# Altium PCB SDP_loadcell.PcbDoc
Units mil, origin at the board's own origin, x right, y up, seen from the top; angles counter-clockwise.
Board outline 2875 x 2400 mil, 2 copper layers (Top Layer, Bottom Layer); 25 components, 31 nets, 158 pads, 51 vias.
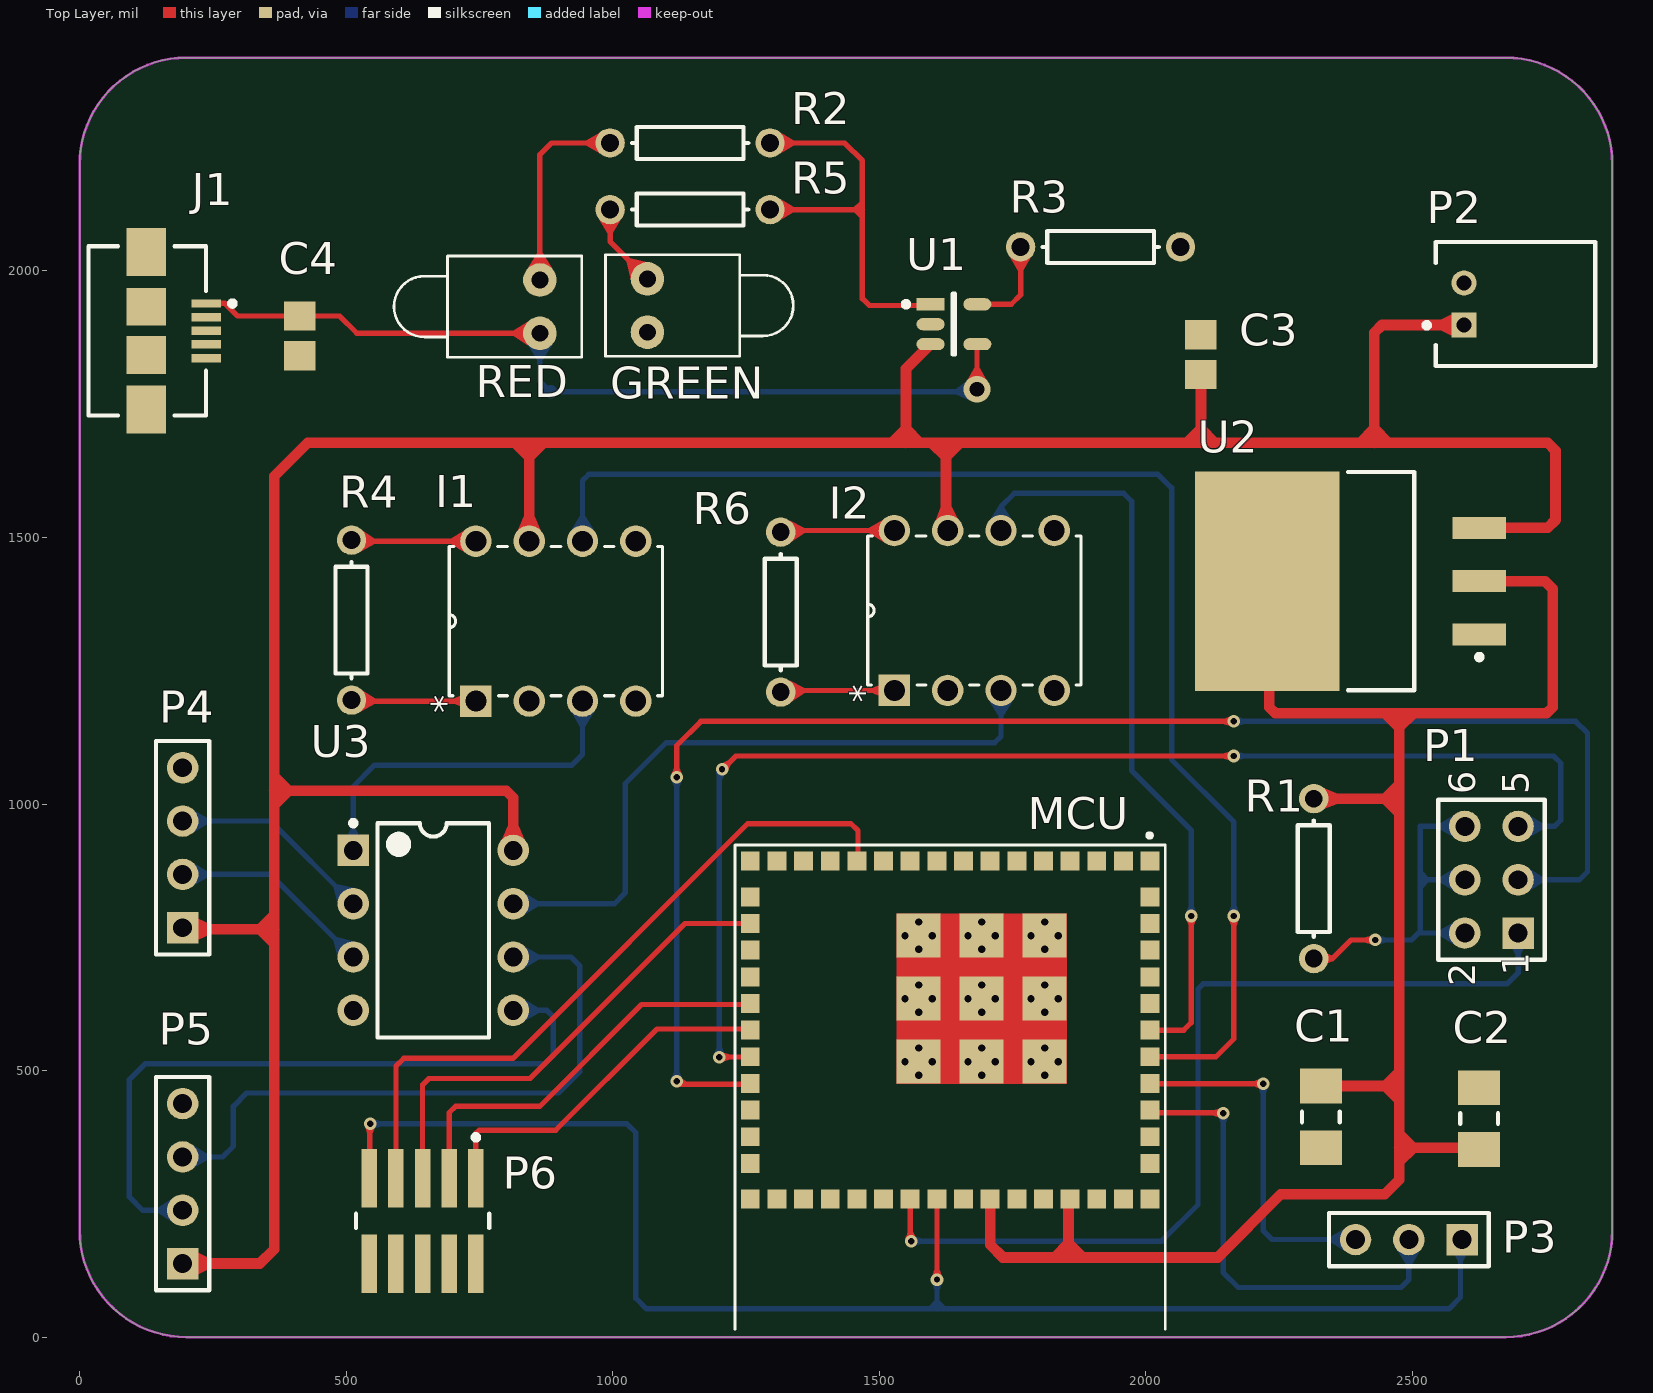
[diagram p0: Top Layer view]
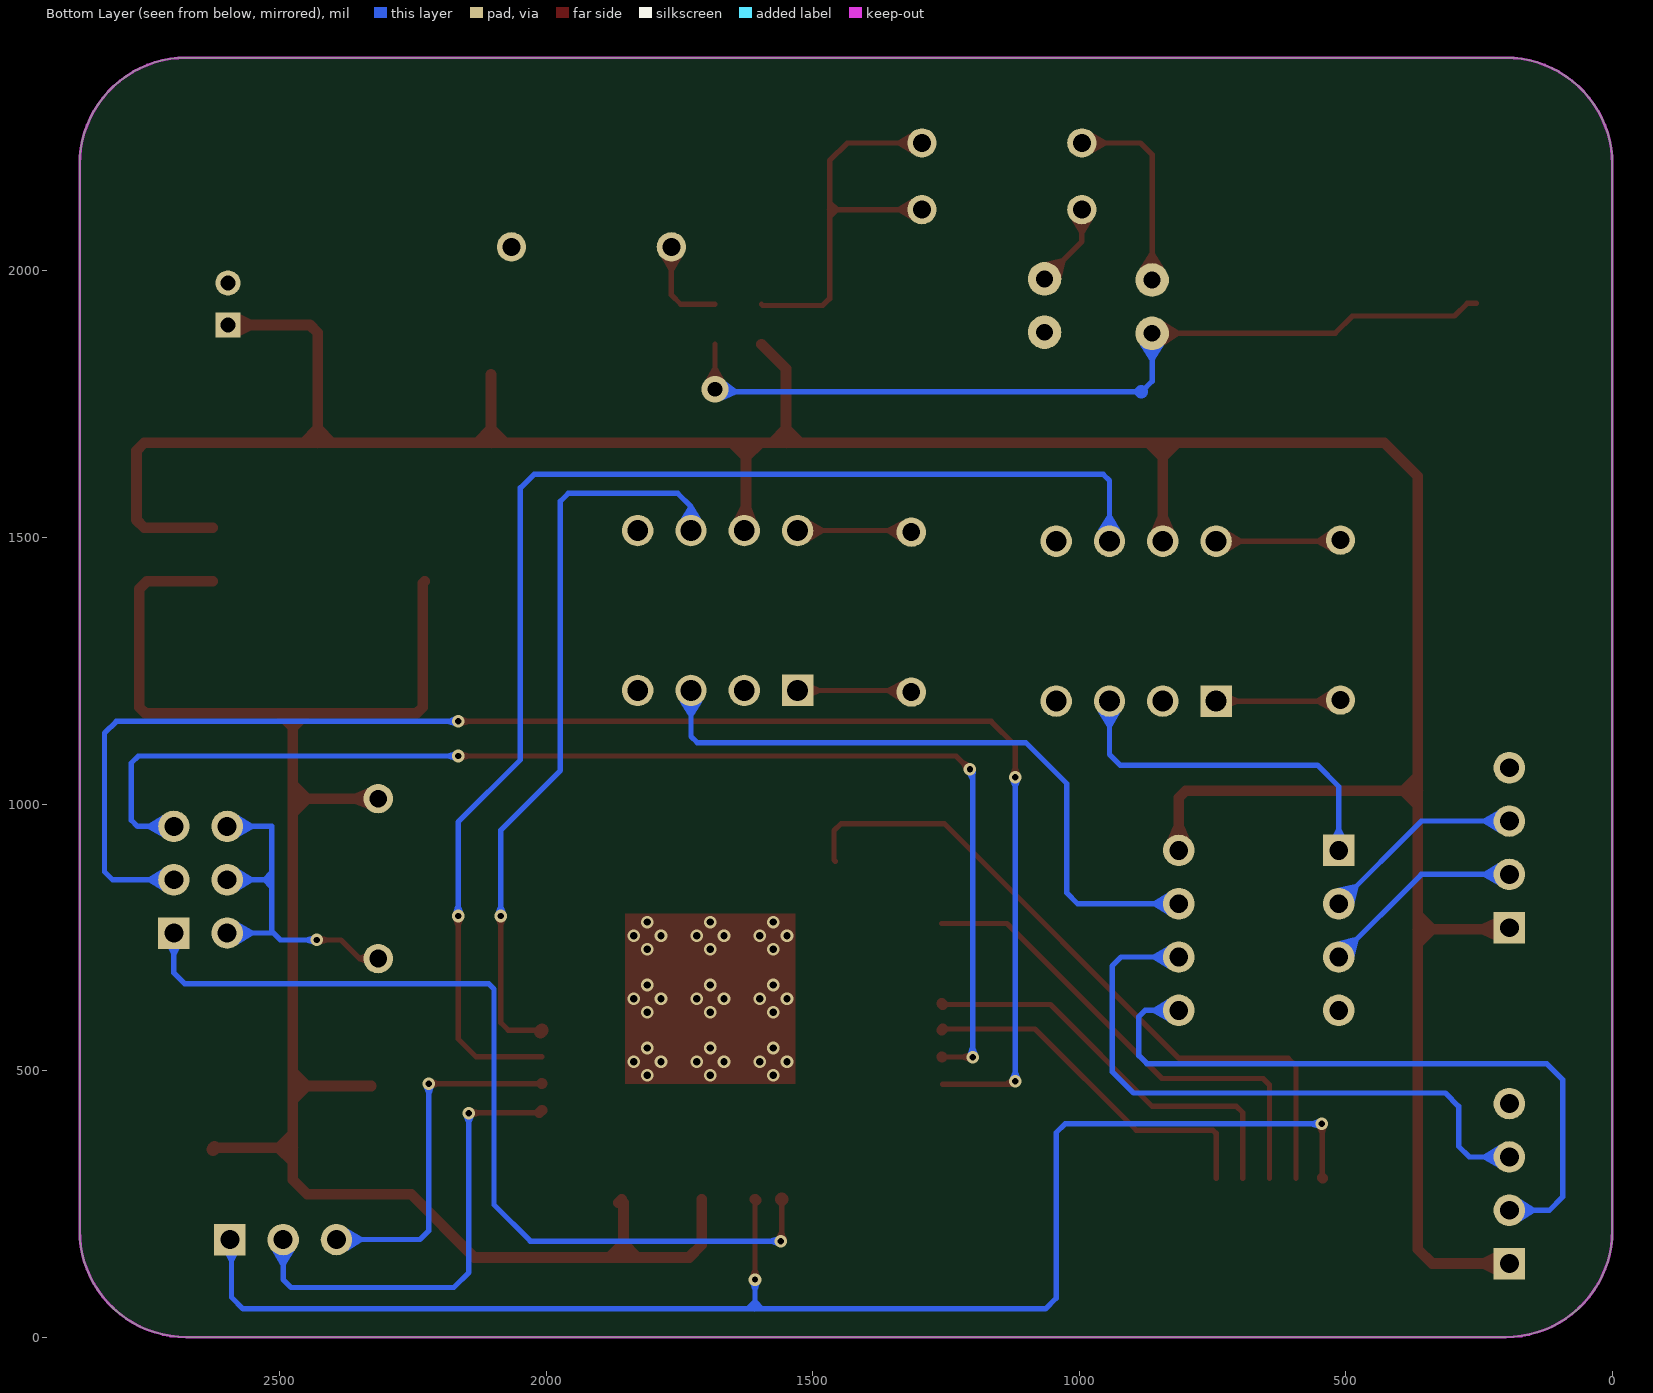
[diagram p1: Bottom Layer view, seen from below]

## Layer stack, top to bottom
Top Solder: solder mask 0.4, Solder Resist, Dk 3.5
Top Layer: signal copper 1.4
Dielectric 1: dielectric 12.6, FR-4, Dk 4.8
Bottom Layer: signal copper 1.4
Bottom Solder: solder mask 0.4, Solder Resist, Dk 3.5

## Board outline
0,200 0,2200 cw(c200,2200) 200,2400 2675,2400 cw(c2675,2200) 2875,2200 2875,200 cw(c2675,200) 2675,0 200,0 cw(c200,200)

## Design rules (kind name [scope] priority, off if disabled: settings)
BoardOutlineClearance [All] p1: gap=7.87 ignorepadtopadclearanceinfootprint=FALSE
Clearance [All] p1: gap=8 ignorepadtopadclearanceinfootprint=FALSE except(9.84: Arc-Hole Track-Hole SMDPad-Hole THPad-Hole Via-Hole Fill-Hole Poly-Hole Region-Hole Text-Hole)
ComponentClearance [All] p1: gap=5 collisioncheckmode=3 verticalgap=5 showdistances=TRUE
DiffPairsRouting [All] p1: maxlimit=15 minlimit=8 mostfreqgap=8 toplayer_minwidth=8 toplayer_maxwidth=1000 toplayer_prefwidth=8 bottomlayer_minwidth=8 bottomlayer_maxwidth=1000 bottomlayer_prefwidth=8 maxuncoupledlength=500
Height [All] p1: minheight=0 maxheight=71497.94 prefheight=500
HoleSize [All] p1: absolutevalues=TRUE maxlimit=248.03 minlimit=11.81 maxpercent=80.000 minpercent=20.000
HoleToHoleClearance [All] p1: gap=9.84 allowstackedmicrovias=FALSE
MinimumAnnularRing [All] p1: minimumring=3
MinimumSolderMaskSliver [All] p1: minsoldermaskwidth=0
PlaneClearance [All] p1: clearance=8
PlaneConnect PlaneConnectPowerPads [InPadClass('PowerPads')] p1: planeconnectstyle=Direct reliefexpansion=20 reliefentries=4 reliefconductorwidth=10 reliefairgap=10
PlaneConnect [All] p2: pad.planeconnectstyle=Relief pad.reliefexpansion=11.81 pad.reliefentries=4 pad.reliefconductorwidth=8 pad.reliefairgap=8 via.planeconnectstyle=Direct via.reliefexpansion=11.81 via.reliefentries=4 via.reliefconductorwidth=5 via.reliefairgap=5
PolygonConnect PowerGround [InNet('GND')OR InNet('+3.3')OR InNet('+3.7')] p1: thpad.connectstyle=Relief thpad.reliefconductorwidth=15 thpad.reliefentries=4 thpad.polygonreliefangle="90 Angle" thpad.airgapwidth=10 smdpad.connectstyle=Relief smdpad.reliefconductorwidth=15 smdpad.reliefentries=4 smdpad.polygonreliefangle="90 Angle" smdpad.airgapwidth=10 via.connectstyle=Direct via.reliefconductorwidth=5 via.reliefentries=4 via.polygonreliefangle="90 Angle" via.airgapwidth=5
PolygonConnect PolygonConnectPowerPads [All vs (InPadClass('PowerPads'))] p2: connectstyle=Direct reliefconductorwidth=10 reliefentries=4 polygonreliefangle="90 Angle" airgapwidth=10
PolygonConnect [All] p3: thpad.connectstyle=Relief thpad.reliefconductorwidth=8 thpad.reliefentries=4 thpad.polygonreliefangle="90 Angle" thpad.airgapwidth=8 smdpad.connectstyle=Relief smdpad.reliefconductorwidth=8 smdpad.reliefentries=4 smdpad.polygonreliefangle="90 Angle" smdpad.airgapwidth=8 via.connectstyle=Direct via.reliefconductorwidth=5 via.reliefentries=4 via.polygonreliefangle="90 Angle" via.airgapwidth=5
RoutingVias [All] p1: holewidth=11.81 width=23.62 viastyle="Through Hole" minholewidth=11.81 minwidth=23.62 maxholewidth=23.62 maxwidth=259.84
SilkToSilkClearance [All] p1: silktosilkclearance=0
SilkToSolderMaskClearance [IsPad] p1: minsilkscreentomaskgap=5 clearancetoexposedcopper=TRUE
SolderMaskExpansion "Tent vias" [IsVia] p1: expansion=2.95 istentingtop=TRUE
SolderMaskExpansion [All] p2: expansion=2.95 istentingtop=FALSE
Width "3.7 Width" [InNet('+3.7')] p1: maxlimit=1000 minlimit=8 preferedwidth=20 minimp=50.000000 maximp=50.000000 favimp=50.000000
Width "Power Width" [InNet('+3.3')] p2: maxlimit=1000 minlimit=8 preferedwidth=20 minimp=50.000000 maximp=50.000000 favimp=50.000000
Width [All] p3: maxlimit=1000 minlimit=8 preferedwidth=10 minimp=50.000000 maximp=50.000000 favimp=50.000000
20 further rules are at their usual default settings.

## Components (designator, comment, footprint, x,y, rotation, side; value= is the part's Value field where it differs from the comment)
C1 "GRM31CR60J107ME39L" CAPC3216X190X55ML30T25 2328.26,412.98 r90 top
C2 "GRM31CR60J107ME39L" CAPC3216X190X55ML30T25 2625,410 r270 top
C3 "GRM21BR61A106KE19L" MURA-0805_H_1.35_M 2103.26,1842.98 r90 top
C4 "GRM21BR61A106KE19L" MURA-0805_H_1.35_M 413.26,1877.98 r90 top
GREEN "LED1" LED-1 1065,1935 r0 top
I1 "AD623ANZ" DIP254P762X533-8 1043.26,1492.98 r90 top
I2 "AD623ANZ" DIP254P762X533-8 1828.26,1512.98 r90 top
J1 "10104110-0001LF" FCI-10104110-0001LF_V 181.1,1887.64 r270 top
MCU "CC3220MODASF12MONR" XCVR_CC3220MODASF12MONR 1632.9,575.81 r270 top
P1 "Header 3X2" HDR2X3 2698.26,757.98 r90 top
P2 "S2B-PH-K-S(LF)(SN)" JST-S2B-PH-K-S_V 2693.26,1937.98 r90 top
P3 "Header 3" HDR1X3 2593.26,182.98 r180 top
P4 "Header 4" HDR1X4 193.26,767.98 r90 top
P5 "Header 4" HDR1X4 193.26,137.98 r90 top
P6 "FTSH-105-01-F-DV-K" SMTC-FTSH-105-01-L-DV-K_V 643.26,217.98 r180 top
R1 "Res1" AXIAL-0.3 2315,860 r90 top value="270 ohm"
R2 "Res1" AXIAL-0.3 1145,2240 r0 top value="470 ohm"
R3 "Res1" AXIAL-0.3 1915,2045 r0 top value="1k ohm"
R4 "Res1" AXIAL-0.3 510,1345 r90 top value="27k ohm"
R5 "Res1" AXIAL-0.3 1145,2115 r0 top value="470 ohm"
R6 "Res1" AXIAL-0.3 1315,1360 r90 top value="27k ohm"
RED "LED1" LED-1 863.26,1932.98 r180 top
U1 "MCP73831T-2ACI/OT" FP-C04-091-OT-IPC_B 1640,1900 r0 top
U2 "LM1086CSX-ADJ/NOPB" KTT0003B_L 2383.26,1417.98 r180 top
U3 "AD823ANZ" ADI-N-8 663.26,762.98 r0 top

## Footprints (in the part's own frame and the unit in brackets; to place one, negate y for a bottom-side part, rotate by r counter-clockwise, add the part's x,y. Pads: shape width x height; smd on the part's side, far side on the other; paste and mask are expansions set on the pad)
ADI-N-8 [mm] "DIP, 8-Leads, Body 9.59x6.6mm, Pitch 2.54mm"
  rect 1.5x1.5 hole 0.9: 1(-3.81,3.81)
  round 1.5 hole 0.9: 2(-3.81,1.27) 3(-3.81,-1.27) 4(-3.81,-3.81) 5(3.81,-3.81) 6(3.81,-1.27) 7(3.81,1.27) 8(3.81,3.81)
  silkscreen extent -3.93,-5.1 2.65,5.23, body extent -3.95,-5.07 3.95,5.07, height 5.33
AXIAL-0.3 [mm] "Axial Device, Thru-Hole; 2 Leads; 0.3 in Pin Spacing"
  round 1.4 hole 0.85: 1(-3.81,0) 2(3.81,0)
  silkscreen extent -2.77,-0.76 2.77,0.76
CAPC3216X190X55ML30T25 [mm] "Chip Capacitor, 2-Leads, Body 3.5x1.9mm, IPC Low Density"
  rect 1.65x2 smd: 1(-1.475,0) 2(1.475,0)
  silkscreen extent -0.25,-0.9 0.25,0.9, body extent -1.75,-0.95 1.75,0.95, height 1.9
DIP254P762X533-8 [mil]
  rect 59x59 hole 39: 1(-300,300)
  round 59 hole 39: 2(-300,200) 3(-300,100) 4(-300,0) 5(0,0) 6(0,100) 7(0,200) 8(0,300)
  silkscreen extent -290,-50 -10,350
FCI-10104110-0001LF_V [mm] "SMD, 5-Leads, Body 8.06x5.6mm, Pitch 0.65mm"
  rect 0.4x1.4 smd: 1(-1.3,1.425) 2(-0.65,1.425) 3(0,1.425) 4(0.65,1.425) 5(1.3,1.425)
  rect 1.8x1.9 smd: 6(-1.15,-1.425) 7(1.15,-1.425)
  rect 2.3x1.9 smd: 8(-3.75,-1.425) 9(3.75,-1.425)
  silkscreen extent -4.03,-4.17 4.03,2.8, body extent -4.03,-4.17 4.03,1.43, height 2.95
FP-C04-091-OT-IPC_B [mm]
  rect 1.338x0.578 smd paste+0 mask+0: 1(-1.116,0.95)
  rrect100% 1.338x0.578 smd paste+0 mask+0: 2(-1.116,0) 3(-1.116,-0.95) 4(1.116,-0.95) 5(1.116,0.95)
  silkscreen extent -2.41,-1.45 0.05,1.45
HDR1X3 [mm] "Connector; Header; 3 Position"
  rect 1.5x1.5 hole 0.9: 1(0,0)
  round 1.5 hole 0.9: 2(2.54,0) 3(5.08,0)
  silkscreen extent -1.27,-1.27 6.35,1.27
HDR1X4 [mm] "Connector; Header; 4 Position"
  rect 1.5x1.5 hole 0.9: 1(0,0)
  round 1.5 hole 0.9: 2(2.54,0) 3(5.08,0) 4(7.62,0)
  silkscreen extent -1.27,-1.27 8.89,1.27
HDR2X3 [mm] "Connector; Header; 3x2 Position"
  rect 1.5x1.5 hole 0.9: 1(0,0)
  round 1.5 hole 0.9: 2(0,2.54) 3(2.54,0) 4(2.54,2.54) 5(5.08,0) 6(5.08,2.54)
  silkscreen extent -1.27,-1.27 6.35,3.81
JST-S2B-PH-K-S_V [mm] "THD, 2-Leads, Body 7.6x5.9mm, Pitch 2mm"
  rect 1.2x1.2 hole 0.7: 1(-1,2.45)
  round 1.2 hole 0.7: 2(1,2.45)
  silkscreen extent -2.95,-3.8 2.95,4.35, body extent -2.95,-3.8 2.95,3.8, height 4.8
KTT0003B_L [mm] "D2-PAK, 3-Leads, Body 10.41x8.89mm, Pitch 2.54mm, IPC High Density"
  rect 2.55x1.05 smd: 1(-6.15,2.54) 2(-6.15,0) 3(-6.15,-2.54)
  rect 6.9x10.45 smd: 4(3.95,0)
  silkscreen extent -6.28,-5.2 0.1,5.2, body extent -6.83,-5.2 7.52,5.2, height 4.64
LED-1 [mm] "LED; 2 Leads"
  round 1.6 hole 0.8: 1(0,1.27) 2(0,-1.27)
  silkscreen extent -2,-2.41 6.95,2.41
MURA-0805_H_1.35_M [mm] "SMD, 2-Leads, Body 2.1x1.35mm, IPC Low Density"
  rect 1.4x1.5 smd: 1(-0.95,0) 2(0.95,0)
  body extent -1.05,-0.67 1.05,0.67, height 1.35
SMTC-FTSH-105-01-L-DV-K_V [mm] "CONN, 10-Leads, Body 6.35x3.43mm, Pitch 1.27mm"
  rect 0.74x2.79 smd: 1(-2.54,-2.035) 2(-2.54,2.035) 3(-1.27,-2.035) 4(-1.27,2.035) 5(0,-2.035) 6(0,2.035) 7(1.27,-2.035) 8(1.27,2.035) 9(2.54,-2.035) 10(2.54,2.035)
  silkscreen extent -3.17,-4.1 3.17,0.34, body extent -3.17,-2.92 3.18,2.92, height 6.12
XCVR_CC3220MODASF12MONR [mm]
  rect 0.9x0.9 smd paste-1 mask+0: 1(-8.05,9.525) 2(-8.05,8.255) 3(-8.05,6.985) 4(-8.05,5.715) 5(-8.05,4.445) 6(-8.05,3.175) 7(-8.05,1.905) 8(-8.05,0.635) 9(-8.05,-0.635) 10(-8.05,-1.905) 11(-8.05,-3.175) 12(-8.05,-4.445) 13(-8.05,-5.715) 14(-8.05,-6.985) 15(-8.05,-8.255) 16(-8.05,-9.525) 17(-6.35,-9.524) 18(-5.08,-9.524) 19(-3.81,-9.524) 20(-2.54,-9.524) 21(-1.27,-9.524) 22(0,-9.524) 23(1.27,-9.524) 24(2.54,-9.524) 25(3.81,-9.524) 26(5.08,-9.524) 27(6.35,-9.524) 28(8.05,-9.525) 29(8.05,-8.255) 30(8.05,-6.985) 31(8.05,-5.715) 32(8.05,-4.445) 33(8.05,-3.175) 34(8.05,-1.905) 35(8.05,-0.635) 36(8.05,0.635) 37(8.05,1.905) 38(8.05,3.175) 39(8.05,4.445) 40(8.05,5.715) 41(8.05,6.985) 42(8.05,8.255) 43(8.05,9.525) 44(6.35,9.524) 45(5.08,9.524) 46(3.81,9.524) 47(2.54,9.524) 48(1.27,9.524) 49(0,9.524) 50(-1.27,9.524) 51(-2.54,9.524) 52(-3.81,9.524) 53(-5.08,9.524) 54(-6.35,9.524)
  rect 2.1x2.1 smd paste-2 mask+0: 55(-4.5,4.5) 56(-4.5,1.5) 57(-4.5,-1.5) 58(-1.5,4.5) 59(-1.5,1.5) 60(-1.5,-1.5) 61(1.5,4.5) 62(1.5,1.5) 63(1.5,-1.5)
  Top Layer region: 2.55,-2.55 -5.55,-2.55 -5.55,5.55 2.55,5.55
  silkscreen extent -9.38,-10.25 14.24,10.25

## Part data
C1 C2: library part CMP-1662-00011-2, "Chip Capacitor, 100 uF, +/- 20%, 6.3 V, -55 to 85 degC, 1206 (3216 Metric), RoHS, Tape and Reel", Capacitance="100 uF", Case Code (Imperial)=1206, Case Code (Metric)=3216, Max Operating Temperature="85 degC", Min Operating Temperature="-55 degC", Package Quantity=2000, Tolerance=20%, Type (Capacitors)=X5R, Voltage Rating="6.3 V", Case\/Package=1206, ComponentLink1Description="Manufacturer URL", ComponentLink1URL=http://www.murata.com/, ComponentLink2Description=Datasheet, ComponentLink2URL=http://psearch.en.murata.com/capacitor/product/GRM31CR60J107ME39%23.pdf, DatasheetVersion=09/2016, Height="1.6 mm", Length="3.2 mm", Mount="Surface Mount", Mounting Technology="Surface Mount", PackageDescription="2-Pin Surface Mount Device, Body 3.2 x 1.6 mm", PackageReference=1206, Packaging="Tape and Reel", PartNumber=GRM31CR60J107ME39L, Pins=2, Radiation Hardening=No, REACH SVHC="No SVHC", RoHSCompliant=true, Voltage Rating (DC)="6.3 V", Width="1.6 mm"
C3 C4: library part CMP-2000-05254-1, "CAP, Ceramic, 10 uF, 10%, 10 V, 0805, RoHS, Tape and Reel", Capacitance=10µF, Manufacturer=Murata, Operating Temperature=-55degC~85degC, Package / Case=0805(2012Metric), Package Description="2-Pin Surface Mount Device (0805), Body 2.1 x 1.35 mm", Package Reference=805, Ratings=-, Standard Package=1, Temperature Coefficient=X5R, Tolerance=±10%, Voltage - Rated=10V, Applications=GeneralPurpose, Catalog Drawings=GRMSeries_0805_1.25, Category=Capacitors, Datasheet URL=https://datasheet.ciiva.com/3777/210grm21br61a106ke1923-3777175.pdf, Datasheet Version=Aug-14, Family=CeramicCapacitors, Featured Product=GA3SafetyRecognizedCapsandHi-CapMLCC, Features=-, Height - Seated (Max)=-, Lead Spacing=-, Lead Style=-, Manufacturer URL=http://www.murata.com/, Mounting Type=SurfaceMount,MLCC, Online Catalog=GRMSeries, Other Names=490-1709-6, Packaging=Digi-Reel, Product Training Modules=High-CapMultilayerCeramicCapacitors, Series=GRM, Size / Dimension="0.079\"Lx0.049\"W(2.00mmx1.25mm)", Thickness (Max)="0.053\"(1.35mm)"
GREEN RED: "Typical RED GaAs LED", LatestRevisionDate=08-Jul-2005, LatestRevisionNote="Mech Layer 1 removed.", PackageDescription="LED; 2 Leads", PackageReference=LED-1, Published=8-Jun-2000, Publisher="Altium Limited"
I1 I2: "Instrumentation Amplifier 1 Circuit Rail-to-Rail 8-PDIP", Package="PDIP-8 Analog Devices", Arrow_Electronics-Purchase-URL=https://snapeda.com/shop?store=Arrow+Electronics&id=9794, Availability=Good, Check_prices=https://www.snapeda.com/parts/AD623ANZ/Analog%20Devices%20Inc./view-part/9794/?ref=eda, DigiKey-Purchase-URL=https://snapeda.com/shop?store=DigiKey&id=9794, MF="Analog Devices", Mouser-Purchase-URL=https://snapeda.com/shop?store=Mouser&id=9794, MP=AD623ANZ, Price=None, SnapEDA_Link=https://www.snapeda.com/parts/AD623ANZ/Analog%20Devices%20Inc./view-part/9794/?ref=snap
J1: library part CMP-2000-05823-1, "Micro USB, Receptacle, -55 to 85 degC, 5-Pin SMD, RoHS, Tape and Reel", Manufacturer="FCI Electronics", Package Description="5-Pin Surface Mount Device, Body 8.06 x 5.6 mm, Pitch 0.65 mm", Connector Mounting=PCB, Connector Type=USBMicroB, Contact Plating=Gold, Contact Termination=SurfaceMountRightAngle, Datasheet URL=http://portal.fciconnect.com/Comergent//fci/drawing/10104110.pdf, Datasheet Version="Rev. C, 03/2011", Gender=Receptacle, Manufacturer URL=http://portal.fciconnect.com/, Mounting Technology=SurfaceMount, No. of Contacts=5, Package Reference=10104110-0001LF
MCU: "IC RF TxRx + MCU WiFi 802.11b/g/n 2.4GHz 63-SMD Module", Package="SMD-63 Texas Instruments", Availability=Unavailable, MF="Texas Instruments", MP=CC3220MODASF12MONR, Price=None, SnapEDA_Link=https://www.snapeda.com/parts/CC3220MODASF12MONR/Texas%20Instruments/view-part/1581700/?ref=snap
P1: "Header, 3-Pin, Dual row", LatestRevisionDate=17-Jul-2002, LatestRevisionNote="Re-released for DXP Platform.", Publisher="Altium Limited"
P2: library part CMP-1755-00004-1, "Male Header, Pitch 2 mm, 1 x 2 Position, Height 4.8 mm, Tail Length 3.4 mm, -25 to 85 degC, RoHS, Bulk", Capacitance="10 uF", Case\Package=Radial, Max Operating Temperature="85 degC", Min Operating Temperature="-40 degC", Package Quantity=200, Tolerance=20%, Voltage Rating="50 V", ComponentLink1Description=Datasheet, ComponentLink1URL=http://www.jst-mfg.com/product/pdf/eng/ePH.pdf, DatasheetVersion=Dec-12, Diameter="5 mm", Height="11 mm", Lead Pitch="2 mm", Length="11 mm", Mount="Through Hole", PackageDescription="Male Header, Pitch 2 mm, 1 x 2 Position, Height 4.8 mm, Tail Length 3.4 mm", PackageReference=S2B-PH-K-S, Packaging=Bulk, Pins=2, Radiation Hardening=No, REACH SVHC="No SVHC", RoHSCompliant=true, Voltage Rating (DC)="50 V"
P3: "Header, 3-Pin", LatestRevisionDate=17-Jul-2002, LatestRevisionNote="Re-released for DXP Platform.", Publisher="Altium Limited"
P4 P5: "Header, 4-Pin", LatestRevisionDate=17-Jul-2002, LatestRevisionNote="Re-released for DXP Platform.", Publisher="Altium Limited"
P6: library part CMP-2000-05352-1, "Male Header, Pitch 1.27 mm, 2 x 5 Position, Height 6.12 mm, RoHS, Tube", Color=Black, Manufacturer=Samtec, Package Description="Male Header, Pitch 1.27 mm, 2 x 5 Position, Height 5.97 mm, Tail Length 4.32 mm", Package Reference=FTSH-105-01-L-DV-K, Category=Connectors,Interconnects, Connector Type=Header,Shrouded, Contact Finish=Gold, Contact Finish Thickness=3µin(0.08µm), Contact Mating Length="0.120\"(3.05mm)", Contact Type=MalePin, Datasheet URL=http://suddendocs.samtec.com/prints/ftsh-1xx-xx-xxx-dv-xxx-mkt.pdf, Datasheet Version="Rev. ET, 10/1995", Family=RectangularConnectors-Headers,MalePins, Fastening Type=-, Features=-, Manufacturer URL=http://www.samtec.com/, Mounting Type=SurfaceMount, Number of Positions=10, Number of Positions Loaded=All, Number of Rows=2, Package URL=http://suddendocs.samtec.com/prints/ftsh-1xx-xx-xxx-dv-xxx-footprint.pdf, Packaging=Tube, Pitch="0.050\"(1.27mm)", Row Spacing="0.050\"(1.27mm)", Series=FTSH, Termination=Solder
R1 R2 R3 R4 R5 R6: "Resistor", LatestRevisionDate=17-Jul-2002, LatestRevisionNote="Re-released for DXP Platform.", PackageDescription="Axial Device, Thru-Hole; 2 Leads; 0.3 in Pin Spacing", PackageReference=AXIAL-0.3, Published=8-Jun-2000, Publisher="Altium Limited"
U1: library part CMP-0133-00143-2, "IC CONTROLLR LI-ION 4.2V SOT23-5", Case/Package=SOT-23, Drain to Source Resistance=350mR, Max Charge Current=500mA, Max Input Voltage=6V, Max Operating Temperature=85°C, Max Output Voltage=4.5V, Max Power Dissipation=1.54W, Min Operating Temperature=-40°C, Min Output Voltage=4.168V, Min Supply Voltage=3.75V, Output Voltage=4.2V, Voltage Rating=4.534V, Contact Plating=Tin, Height=0.051inch, Lead Free="Lead Free", Length=0.122inch, Max Supply Voltage=6V, Mount="Surface Mount", Number of Cells=1, Number of Channels=1, Number of Outputs=1, Number of Pins=5, Output Current=500mA, Packaging="Tape and Reel", Radiation Hardening=No, REACH SVHC="No SVHC", Termination=SMD/SMT, Weight=0.00709oz, Width=0.071inch
U2: library part CMP-0062-00559-5, "1.5A Low Dropout Positive Regulators, 3-pin TO-263, Pb-Free", Manufacturer="Texas Instruments", PackageTopMarking=NSUZXYTTE#*LM1086*CS-ADJ, PowerWise=N, Code_JEDEC=MO-169-AA, ComponentLink1Description="Datasheet URL", ComponentLink1URL=http://www.ti.com/general/docs/lit/getliterature.tsp?genericPartNumber=LM1086&fileType=pdf, CompType="LDO IC", High-Reliability=Y, PackageDescription="TO-263, Molded, .400 x .390 x .180in, 3 Lead, .1in Pitch, Surface Mount", PackageReference=KTT0003B, PartNumber=LM1086CSX-ADJ/NOPB, PinCount=3, RoHS=Y
U3: library part CMP-0384-00236-1, "Double Channel Rail-to-Rail Operational Amplifier, 16 MHz BW, 25 V/us SR, Industrial, 8-pin DIP (N-8), Tube", Amplifiers Per Package=2, Generic Part Number=AD823, Input Bias Current=5pA, Input Offset Voltage=700uV, Manufacturer="Analog Devices", Code_JEDEC=MS-001, ComponentLink1Description="Manufacturer URL", ComponentLink1URL=http://www.analog.com/en/index.html, ComponentLink2Description=Datasheet, ComponentLink2URL=http://www.analog.com/static/imported-files/data_sheets/AD823.pdf, ComponentLink3Description="Package Specification", ComponentLink3URL=http:/www.analog.com/static/imported-files/packages/PKG_PDF/PDIP(N)/N_8.pdf, DatasheetVersion="Rev. E", Iq/Amp=4.2mA, Mounting Technology="Through Hole", PackageDescription="8-Pin Plastic Dual In-Line Package, Row spacing 7.62 mm, Pitch 2.54 mm", PackageReference=N-8, PackageVersion=070606-A, PartNumber=AD823ANZ, Slew Rate=25V/us, Small Signal Bandwidth=16MHz, V Span Max=36V, V Span Min=3V

## Via types
v1: diameter 23.62, hole 13.78, Top Layer to Bottom Layer, tented both sides, 36 vias
v2: diameter 23.62, hole 11.81, Top Layer to Bottom Layer, tented both sides, 14 vias
v3: diameter 50, hole 28, Top Layer to Bottom Layer, tented both sides, 1 vias

## Nets (pads, with @x,y where several pads share a name; then routed paths per layer and width w, separated by ;. In a path a pad name is that pad's centre, name@x,y a point inside that pad or via, vN(x,y) a via of type N, cw(c..) or ccw(c..) an arc to the next point about the centre after c; other vN are vias at no path point)
+3.3: C1.2 C2.2 MCU.37 MCU.40 R1.2 U2.2 U2.4 | length 3513.3
  Top Layer w20: MCU.37 1707.9,173.33 1731.84,149.39 1855,149.39 ; MCU.40@1855,251.78 1855,149.39 ; MCU.40 MCU.40@1865,251.78 ; U2.4 2231.37,1414.35 2231.37,1181.72 2243.09,1170 2475.04,1170 ; R1.2 2475.04,1010 ; C1.2 2475.04,471.05 ; C2.2@2621.93,355 2475.04,355 ; U2.2 2748.61,1417.98 2763.26,1403.33 2763.26,1181.72 2751.54,1170 2475.04,1170 ; 1855,149.39 2134.67,149.39 2253.26,267.98 2447.98,267.98 2475.04,295.04 2475.04,355 ; 2475.04,355 2475.04,471.05 ; 2475.04,471.05 2475.04,1010 ; 2475.04,1010 2475.04,1170
  Top Layer w25: C2.2@2621.93,355 C2.2
+3.7: C3.1 I1.7 I2.7 P2.1 P4.1 P5.1 U1.3 U2.3 U3.8 | length 6136.4
  Top Layer w20: P5.1 337.98,137.98 365,165 365,765 ; P4.1 196.23,765 365,765 ; U3.8 813.26,1011.74 800,1025 365,1025 ; I1.7 843.26,1677.46 ; U1.3 1550,1816.54 1550,1677.46 ; I2.7 1625,1516.23 1625,1677.46 ; C3.1 2103.26,1677.46 ; P2.1 2442.9,1898.61 2428.26,1883.96 2428.26,1677.46 ; U2.3 2753.61,1517.98 2768.26,1532.62 2768.26,1662.82 2753.61,1677.46 2428.26,1677.46 ; 365,765 365,1025 ; 365,1025 365,1614.72 427.74,1677.46 843.26,1677.46 ; 843.26,1677.46 1550,1677.46 ; 1550,1677.46 1625,1677.46 ; 1625,1677.46 2103.26,1677.46 ; 2103.26,1677.46 2428.26,1677.46
ADC3: I1.6 MCU.48 | length 2486.8
  Top Layer w10: MCU.48 2131.09,525.81 2165,559.72 v2(2165,790)
  Bottom Layer w10: I1.6 943.26,1606.61 954.97,1618.33 2022.9,1618.33 2048.26,1592.98 2048.26,1082.98 2165,966.23 v2(2165,790)
ADC4: I2.6 MCU.49 | length 1418
  Top Layer w10: MCU.49 2071.09,575.81 2085,589.72 v2(2085,790)
  Top Layer w25: MCU.49 MCU.49@2010.7,572.98
  Bottom Layer w10: I2.6 1728.26,1557.98 1753.26,1582.98 1958.26,1582.98 1973.26,1567.98 1973.26,1062.98 2085,951.23 v2(2085,790)
E1+: P4.2 U3.3 | length 384.2
  Bottom Layer w10: P4.2 358.26,867.98 U3.3
E1-: P4.3 U3.2 | length 384.2
  Bottom Layer w10: P4.3 358.26,967.98 U3.2
E2+: P5.2 U3.5 | length 1297.1
  Bottom Layer w10: P5.2 118.26,237.98 93.26,262.98 93.26,482.98 123.26,512.98 873.26,512.98 888.26,527.98 888.26,601.26 876.54,612.98 U3.5
E2-: P5.3 U3.6 | length 1185.4
  Bottom Layer w10: P5.3 268.26,337.98 288.26,357.98 288.26,432.98 313.26,457.98 898.26,457.98 938.26,497.98 938.26,696.26 921.54,712.98 U3.6
GND: C1.1 C2.1 C3.2 C4.1 GREEN.2 I1.2 I1.4 I2.2 I2.4 J1.5 MCU.1 MCU.2 MCU.16 MCU.27 MCU.28 MCU.30 MCU.32 MCU.38 MCU.43 MCU.55 MCU.56 MCU.57 MCU.58 MCU.59 MCU.60 MCU.61 MCU.62 MCU.63 P2.2 P4.4 P5.4 P6.2 P6.4 P6.6 P6.8 P6.10 R3.2 U1.2 U2.1 U3.4
  other v1: 1573.85,491.16 1691.96,491.16 1810.07,491.16 1548.26,516.75 1599.44,516.75 1666.37,516.75 1717.55,516.75 1784.48,516.75 1835.66,516.75 1573.85,542.35 1691.96,542.35 1810.07,542.35 1573.85,609.27 1691.96,609.27 1810.07,609.27 1548.26,634.86 1599.44,634.86 1666.37,634.86 1717.55,634.86 1784.48,634.86 1835.66,634.86 1573.85,660.46 1691.96,660.46 1810.07,660.46 1573.85,727.38 1691.96,727.38 1810.07,727.38 1548.26,752.98 1599.44,752.98 1666.37,752.98 1717.55,752.98 1784.48,752.98 1835.66,752.98 1573.85,778.57 1691.96,778.57 1810.07,778.57
GPIO1: MCU.46 P3.2 | length 879.5
  Top Layer w10: MCU.46@2012.98,420.69 v2@2144.31,420.69
  Top Layer w20: MCU.46 MCU.46@2012.98,420.69 ; v2@2144.31,420.69 v2(2145,420)
  Bottom Layer w10: v2(2145,420) 2145,121.23 2173.26,92.98 2478.26,92.98 2493.26,107.98 P3.2
GPIO2: MCU.47 P3.3 | length 668.3
  Top Layer w10: MCU.47@2008.27,475.4 v2@2219.6,475.4
  Top Layer w20: MCU.47@2008.1,476.05 MCU.47 MCU.47@2008.27,475.4 ; v2@2219.6,475.4 v2(2220,475)
  Bottom Layer w10: v2(2220,475) 2220,199.69 2236.72,182.98 P3.3
LC1: I1.3 U3.1 | length 674.9
  Bottom Layer w10: U3.1 513.26,1032.98 553.26,1072.98 923.26,1072.98 943.26,1092.98 I1.3
LC2: I2.3 U3.7 | length 1251.3
  Bottom Layer w10: U3.7 1003.26,812.98 1023.26,832.98 1023.26,1037.98 1100.28,1115 1716.54,1115 1728.26,1126.72 I2.3
N_RST: MCU.35 P3.1 P6.9 | length 2801.1
  Top Layer w10: P6.9@544.31,299.14 v2@544.31,399.31 ; v2@1608.08,108.15 MCU.35@1608.08,258.7
  Top Layer w20: P6.9 P6.9@544.31,299.14 ; v2@544.31,399.31 v2(545,400) ; MCU.35@1605.58,256.56 MCU.35 MCU.35@1608.08,258.7 ; v2@1608.08,108.15 v2(1608.26,107.98)
  Bottom Layer w10: v2(545,400) 1026.59,400 1043.26,383.33 1043.26,72.98 1063.26,52.98 1608.26,52.98 ; v2(1608.26,107.98) 1608.26,52.98 ; P3.1 2590.14,179.86 2590.14,74.86 2568.26,52.98 1608.26,52.98
NetC4_2: C4.2 J1.1 RED.1 U1.4 | length 1636.7
  Top Layer w10: J1.1@254.76,1939.1 272.22,1939.1 295.95,1915.38 C4.2 487.6,1915.38 520,1882.98 RED.1 ; v3(1683.26,1777.98) U1.4@1683.26,1862.6
  Bottom Layer w10: RED.1 863.26,1792.98 883.26,1772.98 ; 883.41,1773.13 v3@1678.41,1773.13
  Bottom Layer w25: 883.26,1772.98 883.41,1773.13 ; v3@1678.41,1773.13 v3(1683.26,1777.98)
NetGREEN_1: GREEN.1 R5.1 | length 159
  Top Layer w10: R5.1 995,2055 GREEN.1
NetI1_1: I1.1 R4.1 | length 233.3
  Top Layer w10: R4.1@510,1192.98 I1.1
NetI1_8: I1.8 R4.2 | length 233.3
  Top Layer w10: R4.2@510,1492.98 I1.8
NetI2_1: I2.1 R6.1 | length 213.3
  Top Layer w10: R6.1@1315,1212.98 I2.1
NetI2_8: I2.8 R6.2 | length 213.3
  Top Layer w10: R6.2@1315,1512.98 I2.8
NetP1_2: P1.2 P1.4 P1.6 R1.1 | length 668.7
  Top Layer w10: R1.1 2350,710 2385,745 v2(2430,745)
  Bottom Layer w10: v2(2430,745) 2498.56,745 2513.26,759.69 ; 2514.97,957.98 2514.97,857.98 ; 2515,957.98 P1.6 ; P1.2 2514.97,757.98 2514.97,857.98 ; P1.4 2514.97,857.98
NetR2_1: R2.1 RED.2 | length 376
  Top Layer w10: RED.2 863.26,2218.26 885,2240 R2.1
NetR2_2: R2.2 R5.2 U1.1 | length 753.2
  Top Layer w10: R5.2 1468.26,2115 ; R2.2 1435,2240 1468.26,2206.74 1468.26,2115 ; U1.1 1593.65,1935 1481.23,1935 1468.26,1947.98 1468.26,2115
NetR3_1: R3.1 U1.5 | length 178.3
  Top Layer w10: U1.5 1747.4,1937.4 1765,1955 R3.1
SOP0: MCU.34 P1.1 | length 1738.5
  Top Layer w10: v2@1557.9,183.08 MCU.34
  Top Layer w20: v2@1557.9,183.08 1560,180.98 v2(1560,180)
  Top Layer w25: MCU.34@1557.82,258.8 MCU.34
  Bottom Layer w10: v2(1560,180) 2029.57,180 2097.9,248.33 2097.9,652.98 2107.9,662.98 2678.26,662.98 2698.26,682.98 P1.1
SOP1: MCU.24 P1.3 | length 2896.5
  Top Layer w10: v2(1120,1050) 1120,1109.72 1165.28,1155 v2(2165,1155) ; v2@1124.68,475.81 1126.1,474.39 MCU.24@1256.52,474.39
  Top Layer w20: v2(1120,480) v2@1120.98,480
  Bottom Layer w10: v2(1120,480) v2(1120,1050) ; v2(2165,1155) 2806.23,1155 2828.26,1132.98 2828.26,872.98 2813.26,857.98 P1.3
  Bottom Layer w20: v2(1120,480) v2@1120.69,480.69
SOP2: MCU.23 P1.5 | length 2381.2
  Top Layer w10: v2@1200.4,525.4 MCU.23@1257.54,525.4 ; v2@1205.98,1065 1230.98,1090 v2(2165,1090)
  Top Layer w20: v2(1200,525) v2@1200.4,525.4 ; v2(1205,1065) v2@1205.98,1065 ; MCU.23@1257.54,525.4 MCU.23
  Bottom Layer w10: v2(1200,525) 1200,1060 v2(1205,1065) ; v2(2165,1090) 2764.81,1090 2778.26,1076.56 2778.26,969.69 2766.54,957.98 P1.5
TCK: MCU.21 P6.3 | length 772.6
  Top Layer w10: P6.3 693.26,421.26 704.97,432.98 862.98,432.98 1054.07,624.07 MCU.21@1256.2,624.07
  Top Layer w20: MCU.21@1256.2,624.07 MCU.21
TDI: MCU.12 P6.7 | length 1328.8
  Top Layer w10: P6.7 593.26,508.33 607.9,522.98 812.98,522.98 1252.98,962.98 1447.02,962.98 1460,950 1460,894.84 MCU.12
TDO: MCU.18 P6.5 | length 915.2
  Top Layer w10: P6.5 643.26,473.28 654.97,485 845,485 1135.81,775.81 MCU.18
TMS: MCU.22 P6.1 | length 680.7
  Top Layer w10: P6.1 743.26,382.12 749.11,387.98 892.98,387.98 1082.98,577.98 MCU.22@1255.78,577.98
  Top Layer w20: MCU.22@1255.78,577.98 MCU.22
pads on no net: I1.5 I2.5 J1.2 J1.3 J1.4 J1.6 J1.7 J1.8 J1.9 MCU.3 MCU.4 MCU.5 MCU.6 MCU.7 MCU.8 MCU.9 MCU.10 MCU.11 MCU.13 MCU.14 MCU.15 MCU.17 MCU.19 MCU.20 MCU.25 MCU.26 MCU.29 MCU.31 MCU.33 MCU.36 MCU.39 MCU.41 MCU.42 MCU.44 MCU.45 MCU.50 MCU.51 MCU.52 MCU.53 MCU.54

## Polygon pours and split planes (outlines as drawn)
GND on Bottom Layer "NONET_L02_P003" (solid, shelved, pour order 3): 0,200 0,2200 cw(c200,2200) 200,2400 2675,2400 cw(c2675,2200) 2875,2200 2875,200 cw(c2675,200) 2675,0 200,0 cw(c200,200)
GND on Top Layer "NONET_L01_P002" (solid, shelved, pour order 2): 0,200 0,2200 cw(c200,2200) 200,2400 2675,2400 cw(c2675,2200) 2875,2200 2875,200 cw(c2675,200) 2675,0 200,0 cw(c200,200)

## Keep-outs
Keep-Out Layer:
  the board outline again, w5

## Silkscreen, mask and mechanical layers (free items; w line width, h text height)
Mechanical 1:
  lines w5: 0,200 ccw(c200,200) 200,0 2675,0 ccw(c2675,200) 2875,200 2875,2200 ccw(c2675,2200) 2675,2400 200,2400 ccw(c200,2200) 0,2200 0,200
  lines w10: 2674.17,0 200,0 cw(c200,200) 0,200 0,2200 cw(c200,2200) 200,2400 2675,2400 cw(c2675,2200) 2875,2200 2875,200 cw(c2675,200) 2675,0

## Text inside footprints (layer, text, board x,y; h text height)
I1: Top Overlay "*" at 709.26,1169.98 h50 r90; Mechanical 13 "*" at 709.26,1169.98 h50 r90
I2: Top Overlay "*" at 1494.26,1189.98 h50 r90; Mechanical 13 "*" at 1494.26,1189.98 h50 r90
J1: Mechanical 6 "PCB EDGE" at 61.1,2207.64 h11.81 r270
P1: Top Overlay "1" at 2718.26,677.98 h50 r90; Top Overlay "2" at 2618.26,657.98 h50 r90; Top Overlay "5" at 2718.26,1017.98 h50 r90; Top Overlay "6" at 2618.26,1017.98 h50 r90